# EAGLE board RiseUp (EAGLE 9.5.2)

Size 160 x 100 mm. Coordinates in mm from the lower left corner, seen from the top.
Outline: 0,0 160,0 160,100 0,100 0,0
Copper layers (1*16): Top 0.035mm / dielectric 1.5mm / Bottom 0.035mm
Design rules "default": minimum track width 6mil, minimum drill 0.35mm, track to track 6mil, track to pad 6mil, pad to pad 6mil, via to via 6mil, smd to smd 6mil, copper to edge 40mil, drill to drill 6mil, minimum pad ring 10mil, minimum via ring 8mil, stop-mask expansion 4mil, vias tented up to drill 0mil, thermal gap 10mil

## Footprints (pad centres in the part's own frame; a part is rotated, then mirrored left to right if it is on the bottom)
C0603 = smd 1.1 x 1: 1 -0.85,0; 2 0.85,0
SOT23-5 = smd 0.55 x 1.2: 1 -0.95,-1.3; 2 0,-1.3; 3 0.95,-1.3; 4 0.95,1.3; 5 -0.95,1.3
USC = smd 0.8 x 0.6: + -1.15,0; - 1.15,0
1X02 = drill 1.016 pad 1.88: 1 0,0; 2 2.54,0
R0603 = smd 1 x 1.1: 1 -0.85,0; 2 0.85,0
ARTEMIS_CAST = smd 0.635 x 1.27: 1 0,18.034; 2 0,16.231; 3 0,14.427; 4 0,12.624; 5 0,10.82; 6 0,9.017; 7 0,7.214; 8 0,5.41; 9 0,3.607; 10 0,1.803; 11 0,0; 12 1.702,0; 13 3.505,0; 14 5.309,0; 15 7.112,0; 16 8.915,0; 17 10.719,0; 18 12.522,0; 19 14.224,0; 20 14.224,1.803; 21 14.224,3.607; 22 14.224,5.41; 23 14.224,7.214; 24 14.224,9.017; 25 14.224,10.82; 26 14.224,12.624; 27 14.224,14.427; 28 14.224,16.231; 29 14.224,18.034
LSM6DS3_CAST = smd 0.635 x 1.27: 1 -2.54,1.27; 2 -2.54,-1.27; 3 2.54,-1.27; 4 2.54,1.27
USB-MICRO-01.BIGGERPADS = smd 0.4 x 1.7: 1 -1.3,1.505; 2 -0.65,1.505; 3 0,1.505; 4 0.65,1.505; 5 1.3,1.505 | smd 1.9 x 1.9: S1 -3.85,-1.27; S2 -1.2,-1.27; S3 1.2,-1.27; S4 3.85,-1.27 | smd 2.1 x 1.6: S5 -3.1,1.28; S6 3.1,1.28

## Placement (x,y rotation side)
C1  [C0603]  29.21,21.59 0 top
C2  [C0603]  25.4,21.59 0 top
C3  [C0603]  21.59,21.59 0 top
C4  [C0603]  17.78,21.59 0 top
CHRG1  MCP73831  [SOT23-5]  27.94,17.78 0 top
D1  [USC]  17.78,25.4 0 top
D2  [USC]  13.97,25.4 0 top
J1  [1X02]  13.97,16.51 0 top
LDO1  MIC5504  [SOT23-5]  21.59,17.78 0 top
R1  [R0603]  13.97,21.59 0 top
R2  [R0603]  29.21,25.4 0 top
R3  [R0603]  25.4,25.4 0 top
R4  [R0603]  21.59,25.4 0 top
U1  [ARTEMIS_CAST]  -21.59,3.81 0 top  (outside the outline)
U$1  LSM6DS3_CAST  [LSM6DS3_CAST]  -3.81,5.08 0 top
USB1  USB.MICRO-BIGGERPADS  [USB-MICRO-01.BIGGERPADS]  11.43,8.89 0 top

## Library data of the parts
C1-C4 R1-R4 = LinnesLab-Passives
CHRG1 = LinnesLab-Power; PROD_ID: IC-09995
D1 D2 = LinnesLab-DiscreteSemi
J1 USB1 = LinnesLab-Connectors
LDO1 = LinnesLab-Power
U1 = LinnesLab-Microcontrollers
U$1 = LinnesLab-Sensors

## Nets
3.3V: C2.1 LDO1.5 U$1.2
BATT: R1.1 R4.2
CHRG.STAT: C1.1 C4.1 CHRG1.4 D1.- D2.- LDO1.1 LDO1.3 R2.1
GND: C1.2 C2.2 C3.2 C4.2 J1.1 LDO1.2 R1.2 R3.1 R4.1 U$1.1 USB1.5
N$5: CHRG1.1 R2.2
N$9: CHRG1.5 R3.2
SCL: U$1.3
SDA: U$1.4
USB+: USB1.3
USB-: USB1.2
V_USB: D2.+ USB1.1
VLIPO: C3.1 CHRG1.3 D1.+ J1.2
VSS: CHRG1.2

## Tracks (layer width: path | path; a pad name or v marks a point on that pad's centre or on a via)
3.3V  (2 unrouted)
BATT  (1 unrouted)
CHRG.STAT  (7 unrouted)
GND  (10 unrouted)
N$5  (1 unrouted)
N$9  (1 unrouted)
V_USB  (1 unrouted)
VLIPO  (3 unrouted)